# EAGLE board dectpsu (EAGLE 4.16)
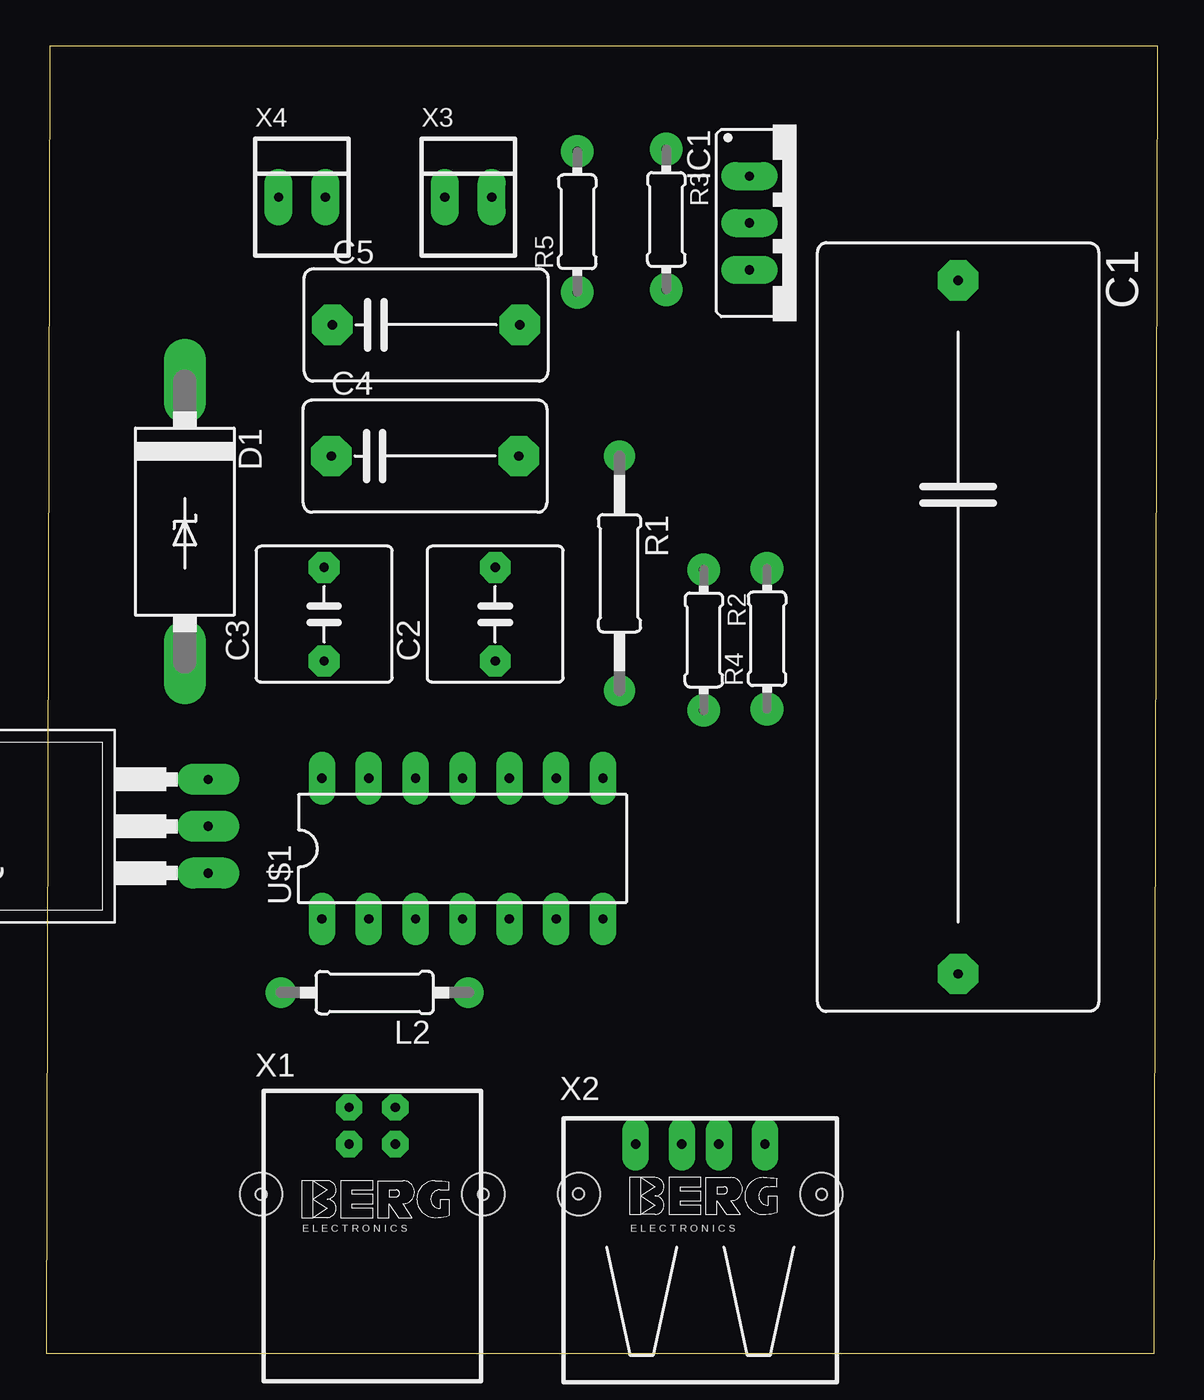
[diagram p0: board, top side]
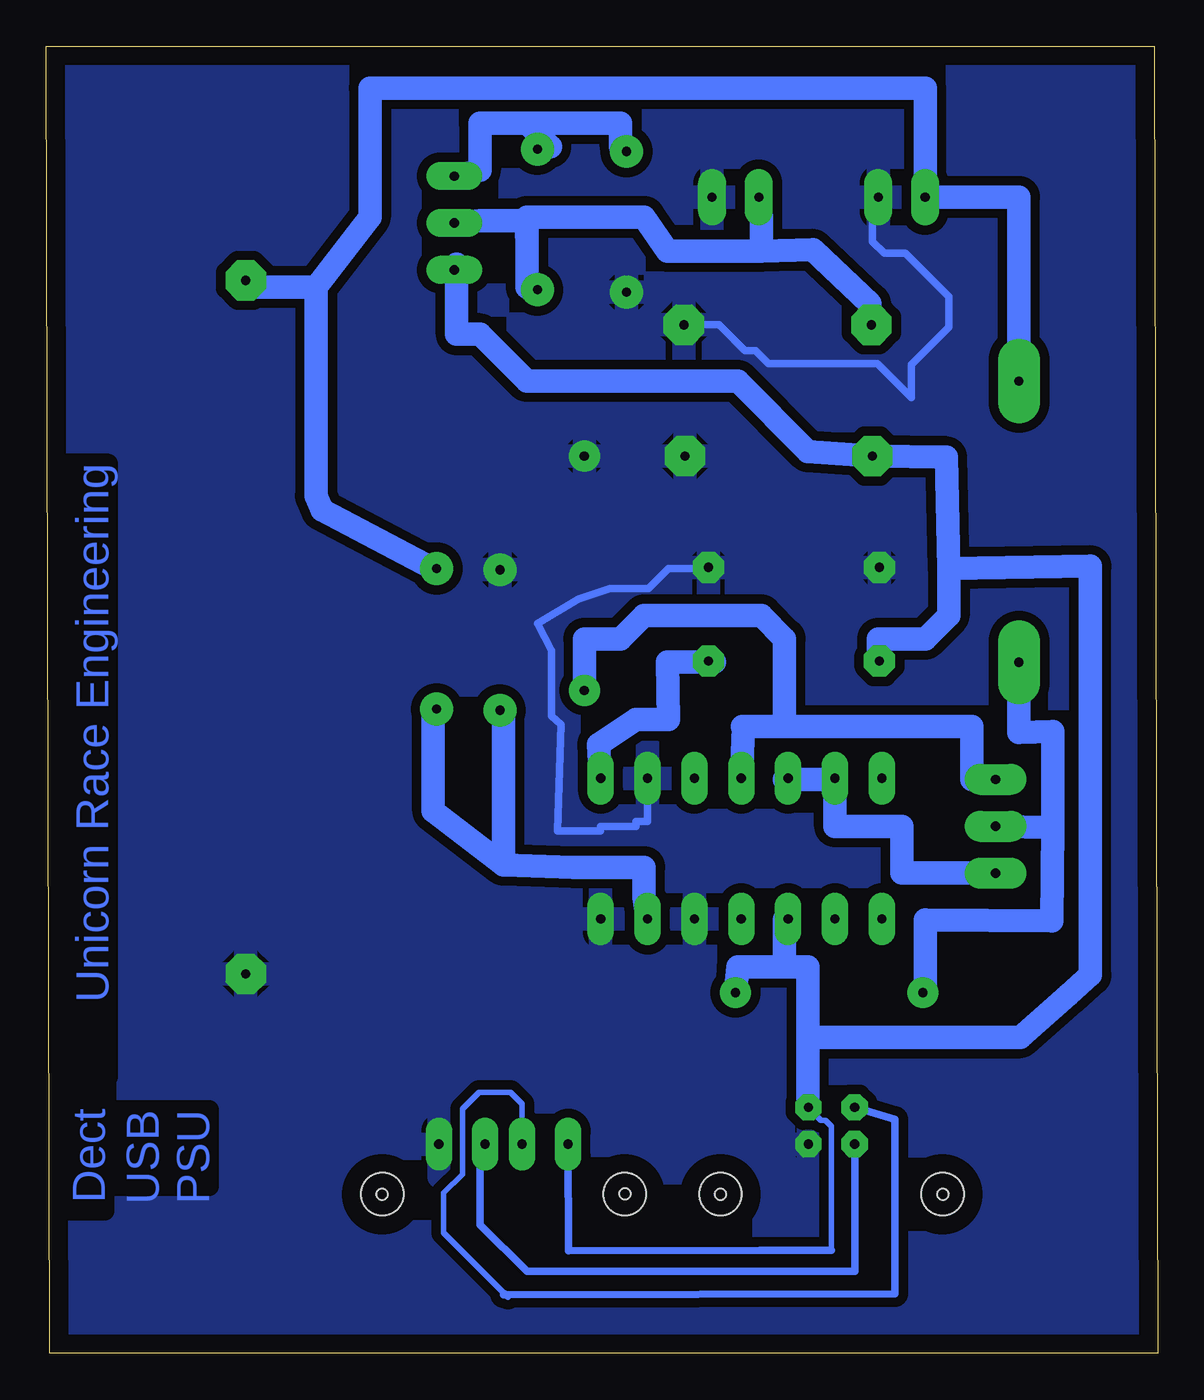
[diagram p1: board, bottom side, seen from below]

Size 60.25 x 70.86 mm. Coordinates in mm from the lower left corner, seen from the top.
Outline: 0,0 60.06,0 60.25,70.86 0.19,70.86 0,0
Copper layers (1*16): Top 0.035mm / dielectric 1.5mm / Bottom 0.035mm
Design rules "default": minimum track width 16mil, minimum drill 1mil, track to track 20mil, track to pad 20mil, pad to pad 20mil, via to via 20mil, smd to smd 8mil, copper to edge 40mil, drill to drill 8mil, minimum pad ring 10mil, minimum via ring 8mil, stop-mask expansion 4mil, vias tented up to drill 0mil, thermal gap 10mil

## Footprints (pad centres in the part's own frame; a part is rotated, then mirrored left to right if it is on the bottom)
C375-155X418 = drill 0.5 pad 2.184 octagon: 1 -18.796,0; 2 18.796,0
C5B7.2 = drill 0.5 pad 1.676 octagon: 1 -2.54,0; 2 2.54,0
C10B6 = drill 0.5 pad 2.184 octagon: 1 -5.08,0; 2 5.08,0
C4111-15 = drill 0.5 pad 2.286 long: A 7.62,0; C -7.62,0
TO220S = drill 0.5 pad 1.524 long: 1 -2.54,-2.54; 2 0,-2.54; 3 2.54,-2.54
0207/10 = drill 0.5 pad 1.676 round: 1 -5.08,0; 2 5.08,0
TO220 = drill 0.5 pad 1.676 long: 1 -2.54,-6.35; 2 0,-6.35; 3 2.54,-6.35
0207/12 = drill 0.5 pad 1.676 round: 1 -6.35,0; 2 6.35,0
0204/7 = drill 0.5 pad 1.778 round: 1 -3.81,0; 2 3.81,0
DIL14 = drill 0.5 pad 1.422 long: 1 -7.62,-3.81; 2 -5.08,-3.81; 3 -2.54,-3.81; 4 0,-3.81; 5 2.54,-3.81; 6 5.08,-3.81; 7 7.62,-3.81; 8 7.62,3.81; 9 5.08,3.81; 10 2.54,3.81; 11 0,3.81; 12 -2.54,3.81; 13 -5.08,3.81; 14 -7.62,3.81
PN61729 = drill 0.5 pad 1.422 octagon: 1 1.25,4.71; 2 -1.25,4.71; 3 -1.25,2.71; 4 1.25,2.71 | hole 2.3: -6.02,0; 6.02,0 | hole 0.6: -6.032,-0.013; 6.02,0
PN87520 = drill 0.5 pad 1.422 long: 1 -3.5,2.71; 2 -1,2.71; 3 1,2.71; 4 3.5,2.71 | hole 2.3: -6.57,0; 6.57,0 | hole 0.6: -6.591,0.025; 6.579,0
22-23-2021 = drill 0.5 pad 1.524 long: 1 -1.27,0; 2 1.27,0

## Placement (x,y rotation side)
C1  [C375-155X418]  49.43,39.37 270 top
C2  0.1u  [C5B7.2]  24.35,40.06 90 top
C3  0.1u  [C5B7.2]  15.08,40.06 90 top
C4  47u  [C10B6]  20.54,48.64 0 top
C5  47u  [C10B6]  20.6,55.75 0 top
D1  1N5818  [C4111-15]  7.52,45.08 270 top
IC1  LT1085CT-V  [TO220S]  40.67,61.27 270 top
L2  [0207/10]  17.81,19.55 180 top
Q1  IRF510  [TO220]  2.44,28.57 90 top
R1  0.4  [0207/12]  31.08,42.29 270 top
R2  34k  [0204/7]  35.65,38.67 270 top
R3  90k  [0204/7]  33.62,61.46 270 top
R4  192k  [0204/7]  39.08,38.73 90 top
R5  40k  [0204/7]  28.79,61.34 90 top
U$1  MAX773  [DIL14]  22.57,27.36 0 top
X1  [PN61729]  17.68,8.63 0 top
X2  [PN87520]  35.46,8.63 0 top
X3  22-23-2021  [22-23-2021]  22.89,62.67 0 top
X4  22-23-2021  [22-23-2021]  13.87,62.67 0 top

## Library data of the parts
C1 L2 R1-R5 = rcl
C2-C5 = capacitor-wima
D1 = diode
IC1 = linear-technology-2
Q1 = transistor-fet
U$1 = maxim
X1 X2 = con-berg
X3 X4 = con-molex

## Nets
+5V: C3.1 C4.1 IC1.3 L2.1 U$1.3 X1.1 X2.1
GND: C1.2 C2.2 C3.2 C4.2 C5.2 R1.1 R2.1 R5.1 U$1.5 U$1.7 U$1.9 X1.4 X2.4 X3.2 X4.2
N$1: Q1.1 U$1.12 U$1.13
N$2: C5.1 IC1.2 R3.2 X3.1
N$3: Q1.3 R1.2 U$1.11
N$4: R2.2 R4.1 U$1.6
N$5: IC1.1 R3.1 R5.2
N$6: D1.A L2.2 Q1.2
N$9: C1.1 D1.C R4.2 X4.1
N$11: X1.3 X2.3
N$12: C2.1 U$1.8
N$13: X1.2 X2.2

## Tracks (layer width: path | path; a pad name or v marks a point on that pad's centre or on a via)
+5V
  Bottom 0.305: 17.68,5.58 17.68,12.31 18,12.63 18.25,12.63 18.95,13.33 X1.1
  Bottom 0.406: 20.22,23.49 U$1.3 | 18.95,13.33 X1.1 | 38,59.05 IC1.3 | 15.14,37.46 C3.1 | X2.1 31.95,5.56 21.55,5.58 17.68,5.58
  Bottom 1.27: 20.22,20.95 20.22,23.49 | 20.22,20.95 22.76,20.95 L2.1 | 18.95,17.14 18.95,20.95 20.22,20.95 | 18.95,13.33 18.95,17.14 | 38,59.05 38,55.24 36.73,55.24 34.19,52.7 22.76,52.7 18.95,48.89 C4.1 11.46,48.57 11.33,42.54 | 15.14,37.46 15.14,38.73 12.6,38.73 11.33,40 11.33,42.54 | 18.95,17.14 7.46,17.14 4.85,19.43 3.65,20.5 3.65,42.67 11.33,42.54
GND
  Bottom 0.406: U$1.9 27.65,28.82 28.28,28.82 28.28,28.57 30.19,28.57 30.19,28.32 32.54,28.32 32.35,34.1 32.86,34.54 32.86,38.1 33.62,39.55 31.39,40.89 29.68,41.46 27.58,41.46 26.5,42.54 24.28,42.54 C2.2 | C5.2 23.77,55.75 22.38,54.35 21.81,54.35 21.11,53.65 15.2,53.65 13.36,51.81 13.36,53.59 11.33,55.62 11.33,57.27 13.68,59.62 14.82,59.62 15.46,60.26 15.46,62.48 15.14,62.8 X4.2
  pour Bottom: -1.37,-0.7 60.86,-0.64 60.8,72.07 -1.31,72.07
N$1
  Bottom 0.406: 20.22,31.11 U$1.12 | U$1.13 17.68,31.11
  Bottom 1.27: 17.68,31.11 20.22,31.11 | U$1.13 17.49,28.57 13.87,28.57 13.87,26.03 Q1.1
N$2
  Bottom 1.27: 34.19,60.32 34.25,61.4 36.73,61.4 IC1.2 | 34.19,60.32 34.19,57.78 R3.2 | 21.49,59.75 18.69,59.81 15.58,56.89 C5.1 | 21.49,59.75 21.49,61.59 X3.1 | 34.19,60.32 34.19,61.59 27.84,61.59 26.57,59.75 21.49,59.75
N$3
  Bottom 0.406: 22.5,33.97 22.44,33.9
  Bottom 1.27: 20.22,33.97 10.06,33.97 10.06,31.11 Q1.3 | 20.22,33.97 22.5,33.97 | 22.44,33.9 U$1.11 | 20.22,33.97 20.22,38.73 21.49,40 27.84,40 29.11,38.73 31.08,38.73 R1.2
N$4
  Bottom 0.406: 35.46,34.92 R2.2 | 39.27,34.92 R4.1
  Bottom 1.27: 35.46,26.47 31.65,26.35 27.84,26.35 27.84,24.76 U$1.6 | 35.46,26.47 35.46,34.92 | 39.27,34.92 39.27,29.39 35.46,26.47
N$5
  Bottom 0.406: 32.92,65.4 R3.1 | R5.2 29.11,65.4
  Bottom 1.27: 34.19,66.67 36.73,66.67 36.73,64.13 IC1.1 | 34.19,66.67 32.92,65.4 | 29.11,65.4 29.11,66.67 34.19,66.67
N$6
  Bottom 0.406: 12.6,19.68 L2.2
  Bottom 1.27: 12.6,19.68 12.6,23.49 5.74,23.43 5.68,28.51 | 5.68,28.51 Q1.2 | 5.68,28.51 5.68,33.71 7.52,33.65 D1.A
N$9
  Bottom 0.406: 39.27,42.54 R4.2
  Bottom 1.27: D1.C 7.52,62.67 X4.1 12.6,68.57 42.7,68.57 42.7,61.59 45.62,57.78 | 39.27,42.54 45.3,45.72 45.62,46.48 45.62,57.78 | 45.62,57.78 49.43,57.78 C1.1
N$11
  Bottom 0.406: X1.3 16.41,10.79 16.41,4.44 34.19,4.44 36.73,6.98 36.73,10.79 X2.3
N$12
  Bottom 0.406: 24.03,37.46 C2.1
  Bottom 1.27: 24.03,37.46 26.57,37.46 26.5,34.35 28.28,34.35 30.32,33.02 U$1.8
N$13
  Bottom 0.305: X2.2 34.46,13.54 35.08,14.16 36.79,14.16 37.68,13.27 37.68,9.71 38.7,8.7 38.7,6.54 35.39,3.23 35.2,3.04
  Bottom 0.406: X1.2 16.41,13.33 14.25,12.7 14.25,3.23 35.46,3.17 35.39,3.23

## Text on the board
Bottom: Unicorn Race Engineering | PSU | USB | Dect